# Altium PCB Sensor.PcbDoc
Units mil, origin at the board's own origin, x right, y up, seen from the top; angles counter-clockwise.
Board outline 1305 x 1310 mil, 2 copper layers (Top Layer, Bottom Layer); 22 components, 16 nets, 91 pads, 7 vias.
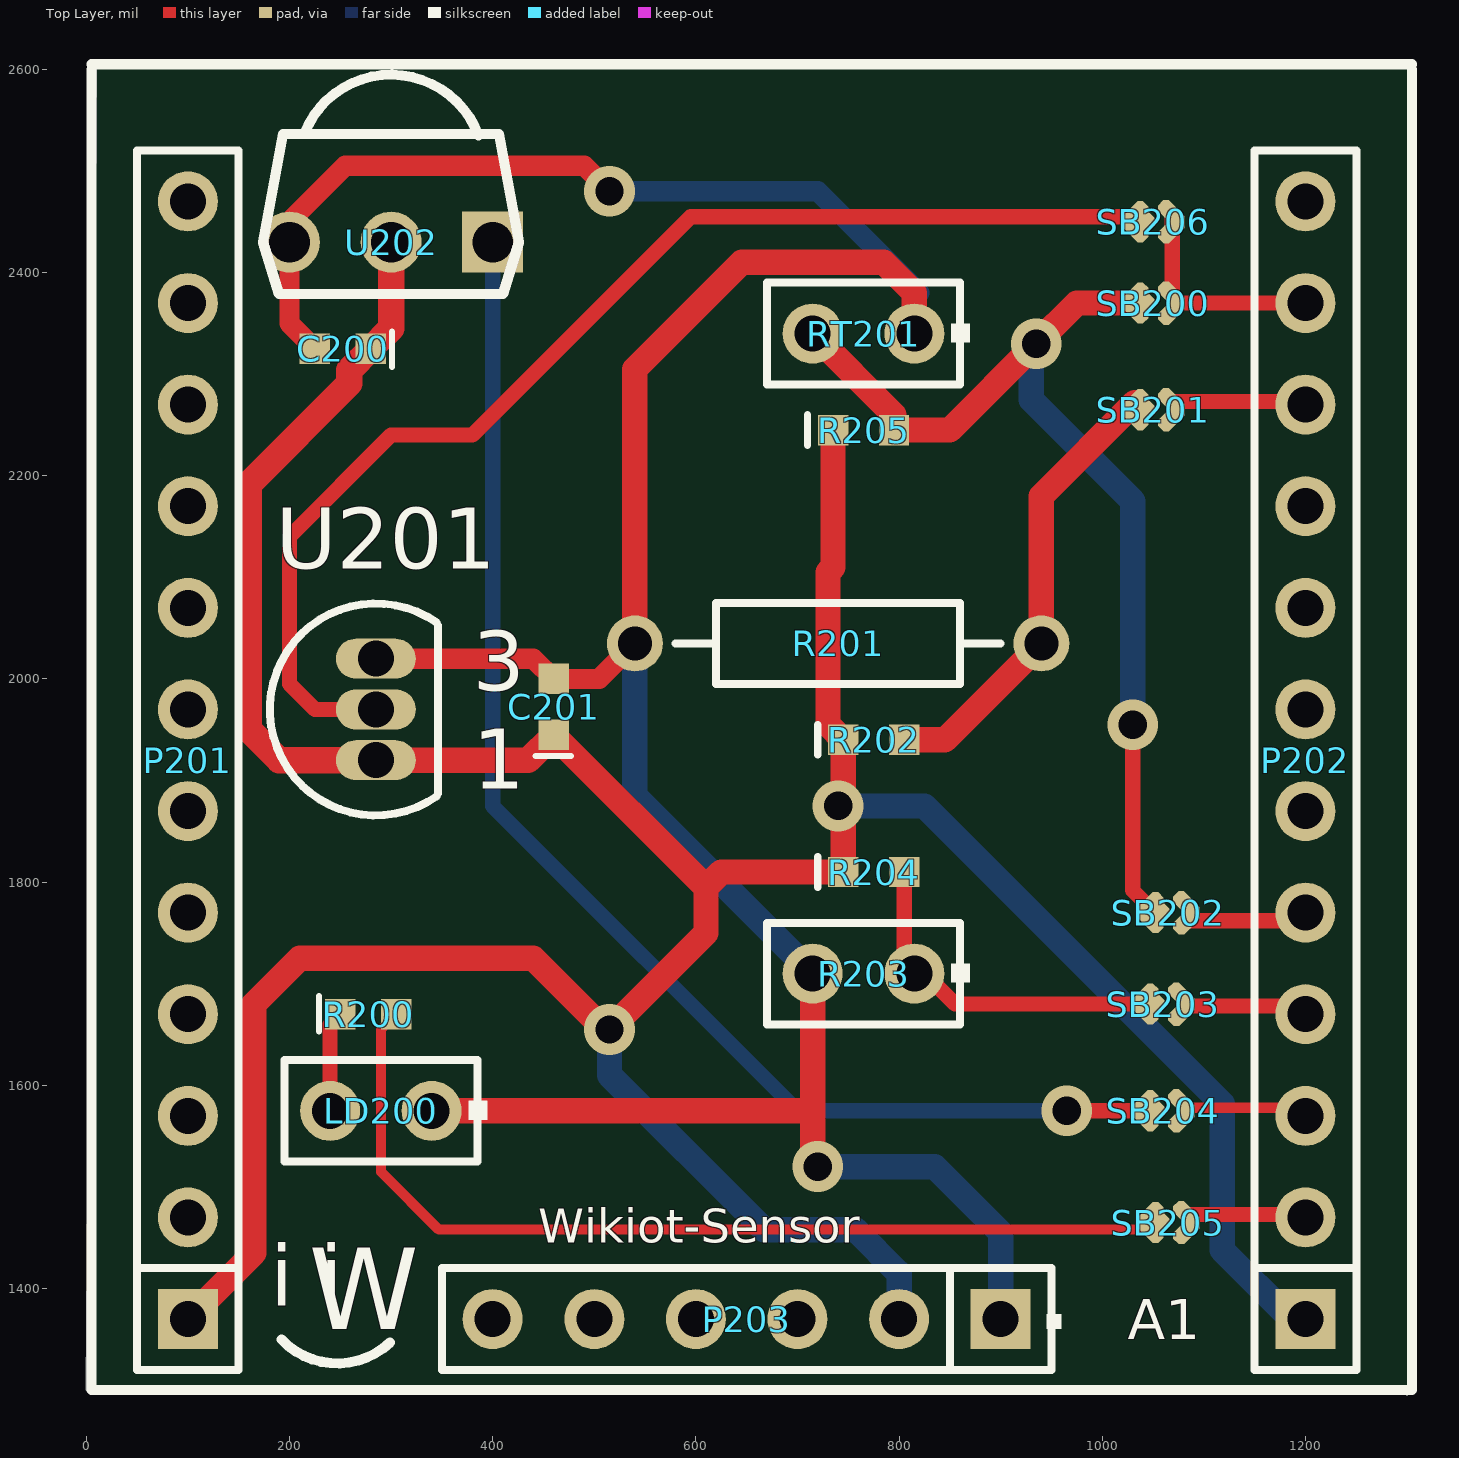
[diagram p0: Top Layer view]
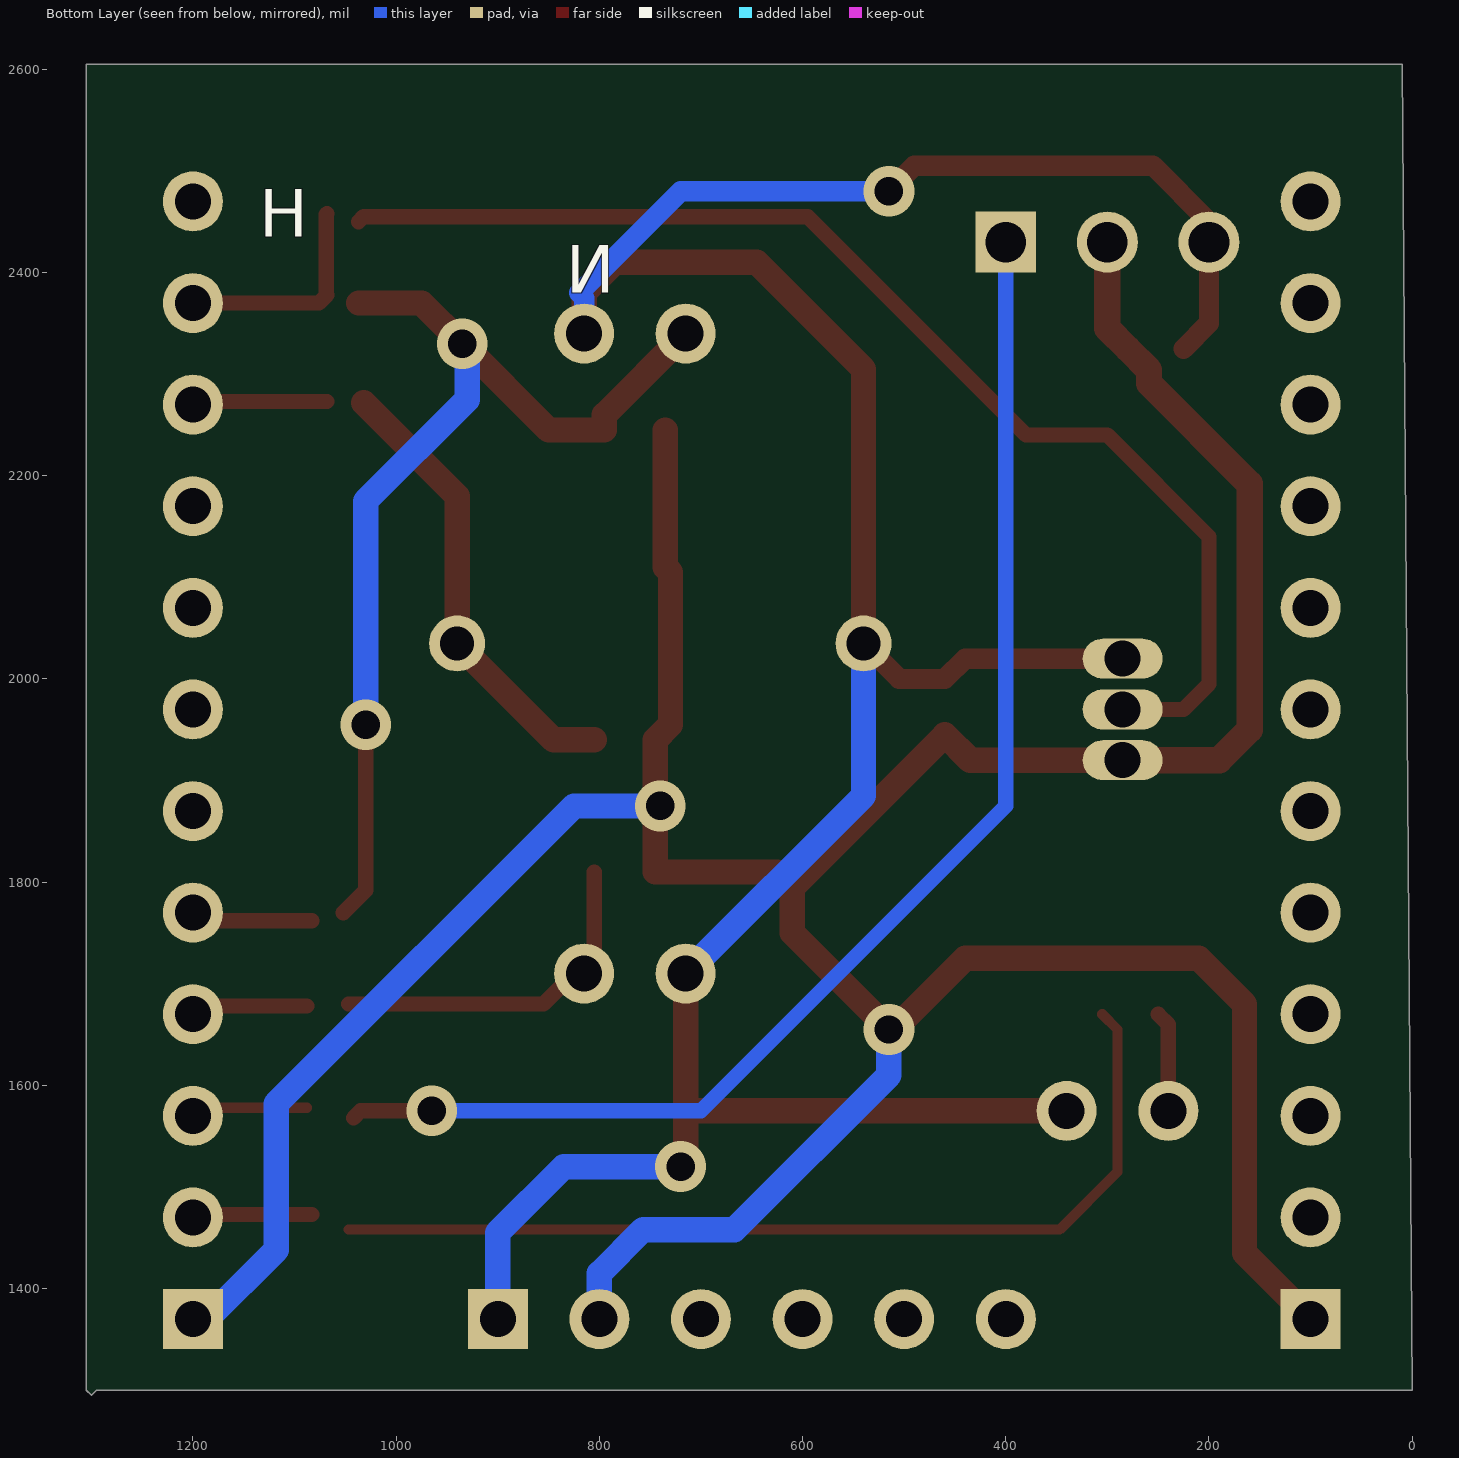
[diagram p1: Bottom Layer view, seen from below]

## Layer stack, top to bottom
Top Solder: solder mask 0.4, Solder Resist, Dk 3.5
Top Layer: signal copper 1.4
Dielectric1: dielectric 12.6, FR-4, Dk 4.8
Bottom Layer: signal copper 1.4
Bottom Solder: solder mask 0.4, Solder Resist, Dk 3.5

## Board outline
10,2605 1305,2605 1305,1300 1300,1295 1295,1300 0,1300

## Design rules (kind name [scope] priority, off if disabled: settings)
Clearance [All] p1: gap=6
PolygonConnect [All] p1: connectstyle=Relief reliefconductorwidth=10 reliefentries=4 polygonreliefangle="90 Angle" airgapwidth=10
RoomDefinition Sensor [InComponentClass('Sensor')] p1: confinementstyle=ConfineIn formatcopy=TRUE lockcomponents=FALSE outline 0,1300 1310,1300 1310,2600 0,2600
RoutingVias [All] p1: holewidth=12 width=25 viastyle="Through Hole" minholewidth=12 minwidth=25 maxholewidth=28 maxwidth=50
SolderMaskExpansion [All] p1: expansion=4
Width [All] p1: maxlimit=55 minlimit=7 preferedwidth=10
29 further rules are at their usual default settings.

## Components (designator, comment, footprint, x,y, rotation, side; value= is the part's Value field where it differs from the comment)
C200 "0.1uF" 0603M 280,2325 r180 top
C201 "0.1uF" 0603M 460,1945 r90 top
LD200 "IR LED" HDR1X2/2.54mm 340,1575 r180 top
P201 "Synio Header-L 12-Pin" HDR1X12 100,1370 r90 top
P202 "Synio Header-R 12-Pin" HDR1X12 1200,1370 r90 top
P203 "Synio Power Header 6 Pin" HDR1X6/2.54MM 900,1370 r180 top
R200 "360R" 0603M 250,1670 r0 top
R201 "Res3" AXIAL-0.4 740,2035 r180 top
R202 "10K" R0603 775,1940 r0 top
R203 "Res3" HDR1X2/2.54mm 815,1710 r180 top
R204 "10K" R0603 775,1810 r0 top
R205 "10K" R0603 765,2245 r0 top
RT201 "NTC-MF52AT 10K 5％" HDR1X2/2.54mm 815,2340 r180 top
SB200 "Circuit Breaker" JP2_SMD 1050,2370 r180 top
SB201 "Circuit Breaker" JP2_SMD 1050,2265 r180 top
SB202 "Circuit Breaker" JP2_SMD 1065,1770 r180 top
SB203 "Circuit Breaker" JP2_SMD 1060,1680 r180 top
SB204 "Circuit Breaker" JP2_SMD 1060,1575 r180 top
SB205 "Circuit Breaker" JP2_SMD 1065,1465 r180 top
SB206 "Circuit Breaker" JP2_SMD 1050,2450 r180 top
U201 "DS18B20" TO92 285,1970 r0 top
U202 "IR 1838" TSOP18 300,2430 r180 top

## Footprints (in the part's own frame and the unit in brackets; to place one, negate y for a bottom-side part, rotate by r counter-clockwise, add the part's x,y. Pads: shape width x height; smd on the part's side, far side on the other; paste and mask are expansions set on the pad)
0603M [mil]
  rect 30x30 smd: 1(0,0) 2(55,0)
  silkscreen extent -21,-17 -21,18, body extent -5,-15 60,15, height 43
AXIAL-0.4 [mm] "Axial Device, Thru-Hole; 2 Leads; 0.4 in Pin Spacing"
  round 1.4 hole 0.85: 1(-5.08,0) 2(5.08,0)
  silkscreen extent -4.06,-1.02 4.06,1.02
HDR1X2/2.54mm [mm]
  round 1.5 hole 0.9: 1(0,0) 2(2.54,0)
  silkscreen extent -1.4,-1.27 3.68,1.27
HDR1X6/2.54MM [mm] "Connector; Header; 6 Position"
  rect 1.5x1.5 hole 0.9: 1(0,0)
  round 1.5 hole 0.9: 2(2.54,0) 3(5.08,0) 4(7.62,0) 5(10.16,0) 6(12.7,0)
  silkscreen extent -1.52,-1.27 13.97,1.27
HDR1X12 [mm] "Connector; Header; 12 Position"
  rect 1.5x1.5 hole 0.9: 1(0,0)
  round 1.5 hole 0.9: 2(2.54,0) 3(5.08,0) 4(7.62,0) 5(10.16,0) 6(12.7,0) 7(15.24,0) 8(17.78,0) 9(20.32,0) 10(22.86,0) 11(25.4,0) 12(27.94,0)
  silkscreen extent -1.27,-1.27 29.21,1.27
JP2_SMD [mil]
  oct 15x30 smd rot 45: 1(-18,-8) 2(18,7)
  oct 15.75x30 smd rot 135: 1(-18,8)
  rect 26x26 smd rot 45: 2(13,0)
  oct 15x30 smd rot 135: 2(18,-7)
R0603 [mil]
  rect 30x30 smd: 1(-30,0) 2(30,0)
  silkscreen extent -55,-15 -55,15, body extent -31,-16 32,15, height 18
TO92 [mm] "TO, Flat Index; 3 In-Line, Axial Leads; Body Dia. 4.8mm; Leads 0.51 x 0.51 mm (max)"
  oval 2x1 hole 0.9: 1(0,-1.27) 2(0,0) 3(0,1.27)
  silkscreen extent -2.65,-2.65 1.55,2.65
TSOP18 [mil]
  rect 60x60 hole 40: 1(-100,0)
  round 60 hole 40: 2(0,0) 3(100,0)
  silkscreen extent -126,-165 126,51

## Part data
C200 C201: library part Cap, "Capacitor"
LD200: library part LED, "Typical RED, GREEN, YELLOW, AMBER GaAs LED"
P201: "Synio Header-L, 12-Pin"
P202: "Synio Header-R, 12-Pin"
R200: library part Res, "Resistor"
R201 R203: "Resistor"
R202 R204 R205: library part Res2, "Resistor"
RT201: library part "Res Thermal", "Thermistor"
U201: "Programmable Resolution  1-Wire Digital Thermometer"
U202: library part 1838, "Photo Modules for PCM Remote Control Systems"

## Via types
v1: diameter 50, hole 28, Top Layer to Bottom Layer, 7 vias

## Nets (pads, with @x,y where several pads share a name; then routed paths per layer and width w, separated by ;. In a path a pad name is that pad's centre, name@x,y a point inside that pad or via, vN(x,y) a via of type N, cw(c..) or ccw(c..) an arc to the next point about the centre after c; other vN are vias at no path point)
D3V3: C200.2 C201.2 LD200.1 P203.1 R201.2 R203.2 RT201.1 U201.3 U202.3 | length 3047.2
  Top Layer w20: C200.2 200,2350 U202.3 200,2450 255,2505 490,2505 v1(515,2480) ; U201.3 440,2020 C201.2 505,2000 R201.2
  Top Layer w25: LD200.1 715,1575 ; R201.2 540,2305 645,2410 785,2410 815,2380 RT201.1 ; R203.2 715,1575 ; v1(720,1520) 715,1525 715,1575
  Bottom Layer w20: v1(515,2480) 720,2480 820,2380 815,2375 RT201.1
  Bottom Layer w25: R201.2 540,1885 R203.2 ; v1(720,1520) 835,1520 900,1455 P203.1
DSQ: SB206.2 U201.2 | length 1209.9
  Top Layer w15: U201.2 225,1970 200,1995 200,2140 300,2240 380,2240 595,2455 1032,2455 SB206.2@1037,2450
GND: C200.1 C201.1 P201.1 P202.1 P203.2 R202.1 R204.1 R205.1 U201.1 U202.2 | length 3787.7
  Top Layer w25: P201.1 165,1435 165,1680 210,1725 440,1725 v1@515,1650 ; U201.1 435,1920 C201.1 610,1795 ; v1(515,1655) 610,1750 610,1795 ; R205.1 735,2110 730,2105 730,1955 R202.1 v1@745,1875 ; v1(740,1875) v1@745,1875 ; 610,1795 625,1810 R204.1 v1@745,1875
  Top Layer w26: U201.1 190,1920 160,1950 160,2192 259,2291 259,2304 C200.1 300,2345 U202.2
  Bottom Layer w25: v1(515,1655) 515,1610 667,1458 757,1458 800,1415 P203.2 ; v1(740,1875) 825,1875 1118,1582 1118,1438 1186,1370 P202.1
IR_CAP: SB204.2 U202.1 | length 1324.2
  Top Layer w15: v1(965,1575) 1035,1575 SB204.2@1042,1568
  Bottom Layer w15: U202.1 400,1875 700,1575 v1(965,1575)
LDR_AD: R201.1 R202.2 SB201.2 | length 449.5
  Top Layer w25: R202.2 845,1940 R201.1 940,2180 SB201.2@1032,2272
NetLD200_2: LD200.2 R200.1 | length 99.1
  Top Layer w15: LD200.2 240,1660 R200.1
NetP202_2: P202.2 SB205.1 | length 118.2
  Top Layer w15: SB205.1@1083,1473 1197,1473 P202.2
NetP202_3: P202.3 SB204.1 | length 115.3
  Top Layer w10: SB204.1@1088,1578 1192,1578 P202.3
NetP202_4: P202.4 SB203.1 | length 115.3
  Top Layer w15: SB203.1@1088,1678 1192,1678 P202.4
NetP202_5: P202.5 SB202.1 | length 120.3
  Top Layer w15: SB202.1@1083,1762 1192,1762 P202.5
NetP202_10: P202.10 SB201.1 | length 133.2
  Top Layer w15: SB201.1@1068,2273 1197,2273 P202.10
NetP202_11: P202.11 SB200.1 SB206.1 | length 216
  Top Layer w15: SB206.1@1068,2458 1068.88,2457.12 1068.88,2378.88 1068,2378 1076,2370 P202.11
NRST: P203.5
PRS_AD: R203.1 R204.2 SB203.2 | length 348.6
  Top Layer w15: R204.2 805,1720 R203.1 825,1710 855,1680 SB203.2@1047,1680
PWM0/IR: R200.2 SB205.2 | length 941.8
  Top Layer w10: R200.2 290,1655 290,1515 347,1458 SB205.2@1047,1458
TEM_AD: R205.2 RT201.2 SB200.2 SB202.2 | length 1049.5
  Top Layer w15: v1(1030,1955) 1030,1792 SB202.2@1052,1770
  Top Layer w25: RT201.2 795,2260 R205.2 850,2245 v1(935,2330) 975,2370 SB200.2@1037,2370 ; v1@1025,1955 v1(1030,1955)
  Bottom Layer w25: v1(935,2330) 930,2335 930,2275 1030,2175 v1(1030,1955)
pads on no net: P201.2 P201.3 P201.4 P201.5 P201.6 P201.7 P201.8 P201.9 P201.10 P201.11 P201.12 P202.6 P202.7 P202.8 P202.9 P202.12 P203.3 P203.4 P203.6

## Silkscreen, mask and mechanical layers (free items; w line width, h text height)
Top Overlay:
  lines w10: 5,2600 5,1300 1305,1300 1305,2600 ; 5,2605 1305,2605 ; 192,1350 ccw(c247,1402) 299,1347
  text "Wikiot-Sensor" at 445,1445 h33.46
  text "i i" at 181,1383 h60
  text "W" at 219,1360 h80
  text "A1" at 1025,1350 h39.37
Bottom Overlay:
  text "H" at 1135,2420 h80
  text "N" at 785,2365 h80

## Text inside footprints (layer, text, board x,y; h text height)
U201: Top Overlay "3" at 380.32,1988.39 h59.05; Top Overlay "1" at 380.32,1892.09 h59.05